# EAGLE board motorshieldv7_jd (EAGLE 5.06)
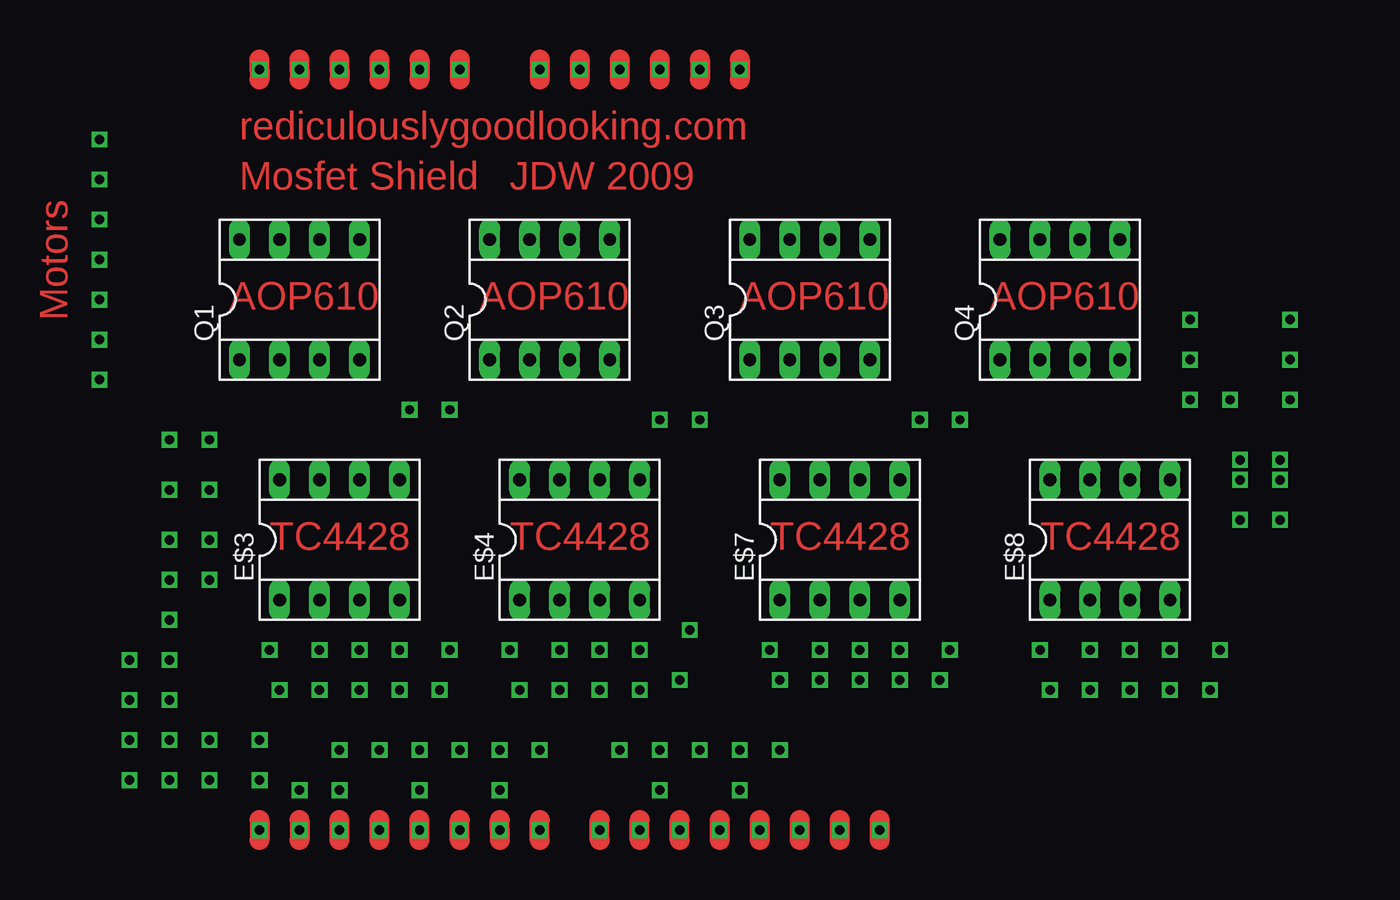
[diagram p0: board, top side]
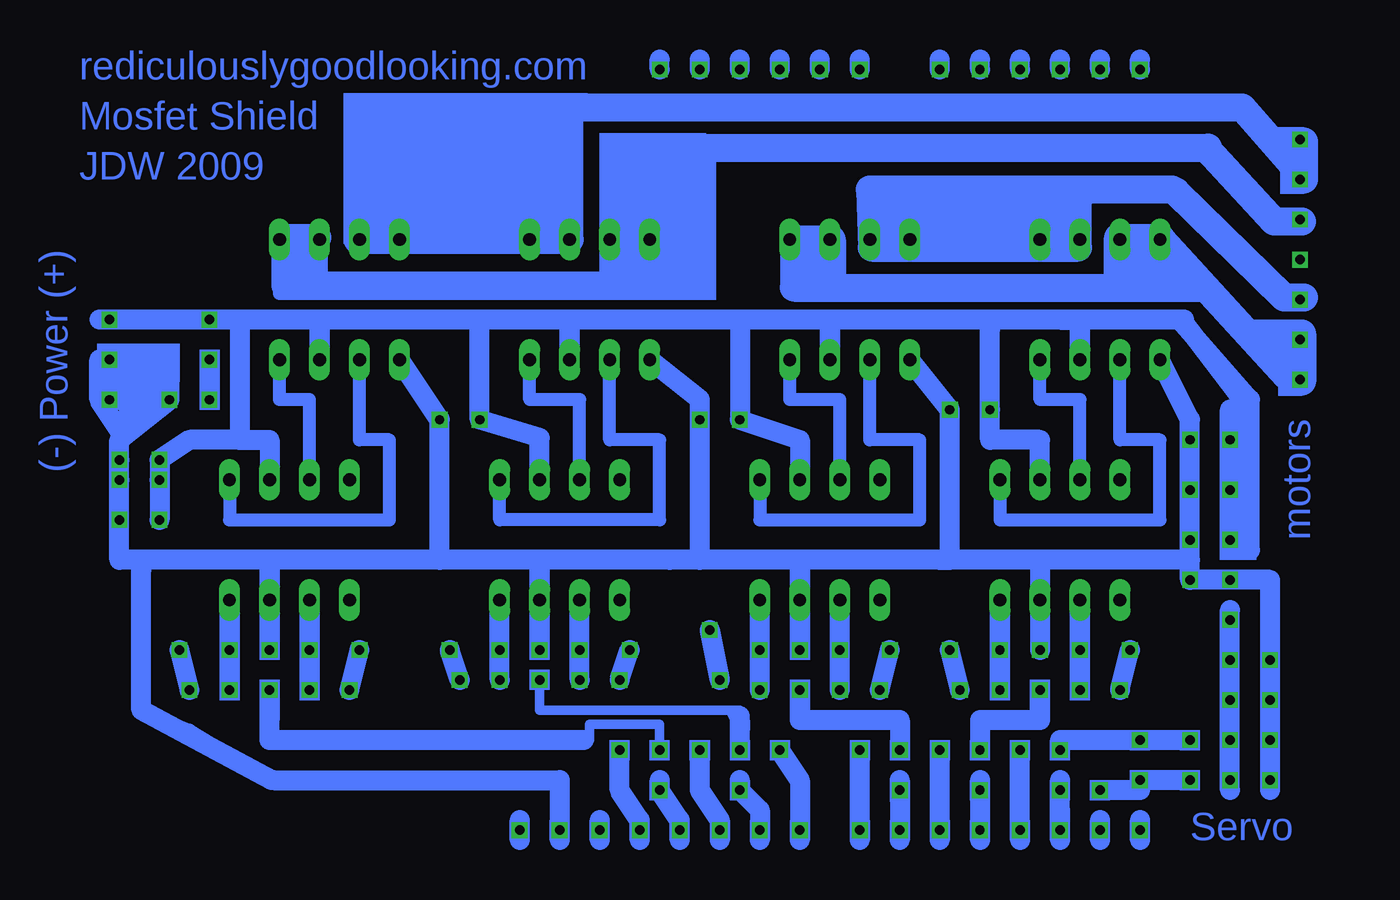
[diagram p1: board, bottom side, seen from below]

No outline drawn. Coordinates in mm, seen from the top.
Copper layers (1*16): Top 0.035mm / dielectric 1.5mm / Bottom 0.035mm
Design rules "default": minimum track width 10mil, minimum drill 24mil, track to track 8mil, track to pad 8mil, pad to pad 8mil, via to via 8mil, smd to smd 8mil, copper to edge 40mil, drill to drill 8mil, minimum pad ring 10mil, minimum via ring 8mil, stop-mask expansion 4mil, vias tented up to drill 0mil, thermal gap 10mil

## Footprints (pad centres in the part's own frame; a part is rotated, then mirrored left to right if it is on the bottom)
SOCKET-08 = drill 0.813 long: 1 -3.81,-3.81; 2 -1.27,-3.81; 3 1.27,-3.81; 4 3.81,-3.81; 5 3.81,3.81; 6 1.27,3.81; 7 -1.27,3.81; 8 -3.81,3.81

## Placement (x,y rotation side)
E$3  TC4427  [SOCKET-08]  15.24,18.41 0 top
E$4  TC4427  [SOCKET-08]  30.48,18.41 0 top
E$7  TC4427  [SOCKET-08]  46.99,18.41 0 top
E$8  TC4427  [SOCKET-08]  64.14,18.41 0 top
Q1  AOP610  [SOCKET-08]  12.7,33.66 0 top
Q2  AOP610  [SOCKET-08]  28.57,33.66 0 top
Q3  AOP610  [SOCKET-08]  45.09,33.66 0 top
Q4  AOP610  [SOCKET-08]  60.96,33.66 0 top

## Library data of the parts
E$3 E$4 E$7 E$8 Q1-Q4 = ic-package

## Nets
GND: E$3.3 E$4.3 E$7.3 E$8.3 Q1.1 Q2.1 Q3.1 Q4.1
S$1: E$3.5 Q1.2
S$3: E$3.7 Q1.4
S$6: E$4.7 Q2.4
S$7: E$4.5 Q2.2
S$11: Q3.7 Q3.8 Q4.5 Q4.6
S$12: Q1.7 Q1.8 Q2.5 Q2.6
S$13: E$3.2
S$15: E$3.4
S$16: Q3.6
S$18: E$7.5 Q3.2
S$19: Q1.3 Q2.3 Q3.3
S$22: E$7.7 Q3.4
S$23: E$8.7 Q4.4
S$28: E$8.5 Q4.2
S$29: E$4.2
S$31: E$4.4
S$32: E$7.2
S$34: E$7.4
S$35: E$8.2
S$39: Q1.6
S$41: E$8.4
S$72: E$7.6
VCC: Q4.3

## Tracks (layer width: path | path; a pad name or v marks a point on that pad's centre or on a via)
GND  (via drill 0.6)
  Bottom 0.406: v65.41,11.43 E$8.3 65.41,17.14 | v48.26,11.43 E$7.3 48.26,17.14 | v31.75,11.43 E$4.3 31.75,16.51 | v22.23,26.67 22.23,27.3 | v16.51,11.43 E$3.3 16.51,17.14
  Bottom 0.813: 46.99,3.17 v46.99,0 | 65.15,3.17 65.28,3.17 70.48,6.35 73.66,7.62 73.66,17.14 65.41,17.14 | 65.41,17.14 v65.41,11.43 | 65.41,17.14 54.61,17.14 48.26,17.14 | 48.26,17.14 v48.26,11.43 | 48.26,17.14 40.01,17.14 38.1,17.14 | 31.75,16.51 31.75,17.14 22.86,17.14
  Bottom 1.27: 46.99,-0.64 46.99,3.17 65.15,3.17 | 73.53,16.51 73.53,7.62 65.28,3.17 | 71.75,29.84 v71.75,27.3 74.93,24.77 v74.93,23.5 v74.93,22.23 74.93,17.14 73.66,17.14 40.01,17.14 22.86,17.14 | Q4.1 54.61,26.04 54.61,17.14 | Q3.1 38.1,27.3 38.1,17.14 | 31.75,16.51 v31.75,11.43 | v22.23,26.67 Q2.1 v22.23,26.67 | v22.23,26.67 22.23,17.14 22.86,17.14 | 16.51,17.14 22.86,17.14 | 16.51,17.14 v16.51,11.43 | Q1.1 6.99,26.04 v6.99,15.88 | 16.51,17.14 6.99,17.14 v6.99,15.88 | v6.99,15.88 1.91,15.88 1.91,2.54
S$1
  Bottom 0.813: E$3.5 19.05,19.68 8.89,19.68 8.89,24.77 11.43,24.77 Q1.2
S$2  (via drill 0.6)
  Bottom 0.406: v31.75,0 31.75,3.17 33.02,4.45 v33.02,5.08
  Bottom 1.27: 31.75,-0.64 31.75,3.17 v33.02,5.08
S$3
  Bottom 0.813: E$3.7 13.97,27.3 16.51,27.3 Q1.4
S$4  (via drill 0.6)
  Bottom 0.406: v34.29,0 34.29,1.27
  Bottom 1.27: 34.29,-0.64 34.29,1.27 v35.56,2.54 35.56,3.17
S$5  (via drill 0.6)
  Bottom 0.406: v36.83,0 36.83,0.64 36.83,1.27 38.1,2.54
  Bottom 1.27: 36.83,-0.64 36.83,0.64 38.1,2.54 v38.1,5.08
S$6
  Bottom 0.813: Q2.4 32.38,27.3 29.21,27.3 E$4.7
S$7
  Bottom 0.813: E$4.5 34.29,19.68 24.13,19.68 24.13,24.77 27.3,24.77 Q2.2
S$8  (via drill 0.6)
  Bottom 0.406: v40.64,2.54 39.37,1.27 39.37,0.64
  Bottom 1.27: 39.37,-0.64 v39.37,0 39.37,0.64 v40.64,2.54 40.64,3.17
S$9  (via drill 0.6)
  Bottom 0.406: v41.91,0 41.91,0.64 41.91,1.27 43.18,2.54
  Bottom 1.27: 41.91,-0.64 41.91,0.64 43.18,2.54 v43.18,5.08
S$10  (via drill 0.6)
  other vias: 44.45,0
S$11  (via drill 0.6)
  Bottom 0.406: Q4.5 Q4.6 | 38.1,37.47 Q3.8
  Bottom 0.813: Q4.5 Q4.6 | Q4.5 62.1,37.47 | Q4.5 64.77,34.04 43.81,34.04 Q3.7 | Q3.7 43.81,34.92 | Q3.7 38.1,37.47 38.1,43.69 6.86,43.69 1.91,38.73 v0,38.73
S$12
  Bottom 0.406: Q2.6 32.13,37.47 Q2.5 | Q1.8 Q1.7
  Bottom 0.813: 0.25,30.86 0.51,28.83 0.51,28.96 8.89,37.72 11.56,37.72 11.56,37.59 11.56,34.67 32.38,34.67 32.38,37.59 29.59,37.59 | Q1.8 Q1.7
  Bottom 1.778: 29.72,37.47 32.13,37.47 32.13,34.42 11.56,34.42 11.56,37.59 9.02,37.59 Q1.8 8.76,37.47 0.89,28.83
S$13  (via drill 0.6)
  Bottom 0.406: E$3.2 v13.97,11.43 v13.97,8.89
  Bottom 0.813: v13.97,8.89 E$3.2
S$14  (via drill 0.6)
  Bottom 1.27: v16.51,8.89 16.51,6.99 20.32,6.99 v20.32,5.08
S$15  (via drill 0.6)
  Bottom 0.406: E$3.4 v19.05,11.43 v19.05,8.89
  Bottom 1.27: v19.05,8.89 19.05,15.24
S$16
  Bottom 0.406: 46.35,38.1 46.35,38.73
  Bottom 0.813: Q3.6 46.35,38.1
  Bottom 1.778: 59.82,37.47 Q3.6 46.35,45.72
S$17  (via drill 0.6)
  Bottom 0.406: v4.45,18.41 v4.45,21.59
  Bottom 0.813: v4.45,18.41 v4.45,21.59
S$18
  Bottom 0.813: E$7.5 50.8,19.68 40.64,19.68 40.64,24.77 43.81,24.77 Q3.2
S$19  (via drill 0.6)
  Bottom 0.813: 46.35,32.38 52.07,32.38 | 46.35,32.38 Q3.3 | 46.35,32.38 35.56,32.38 29.84,32.38 Q2.3 | 15.24,32.38 19.05,32.38 19.68,32.38 | 13.97,32.38 Q1.3
  Bottom 1.27: 31.75,21.59 31.75,24.77 v35.56,26.04 35.56,32.38 | v72.39,19.68 v72.39,22.23 v72.39,23.5 70.48,24.77 67.31,24.77 | 65.41,21.59 65.41,24.77 67.31,24.77 | 19.05,32.38 35.56,32.38 | 35.56,32.38 67.31,32.38 | 67.31,32.38 76.2,32.38 | 67.31,32.38 67.31,24.77 | 15.24,32.38 35.56,32.38 | 15.24,32.38 13.97,32.38 13.97,29.21 | 15.24,32.38 7.62,32.38 3.17,27.3 3.17,17.78 4.45,17.78 4.45,26.67
S$20  (via drill 0.6)
  Bottom 0.406: v6.99,5.71 v10.16,5.71 15.24,5.71
  Bottom 1.27: v6.99,5.71 15.24,5.71 v15.24,5.08
S$21  (via drill 0.6)
  other vias: 0,36.2
S$22
  Bottom 0.406: Q3.4 48.9,27.94
  Bottom 0.813: E$7.7 45.72,27.3 48.9,27.3 Q3.4
S$23
  Bottom 0.406: Q4.4 64.77,27.94
  Bottom 0.813: E$8.7 62.87,27.3 64.77,27.3 Q4.4
S$24  (via drill 0.6)
  Bottom 0.813: 1.27,33.66 v0,33.66
S$25  (via drill 0.6)
  other vias: 4.45,8.26
S$26  (via drill 0.6)
  Bottom 1.27: v40.64,48.26 40.64,48.9
S$27  (via drill 0.6)
  Bottom 1.27: v35.56,48.26 35.56,48.9
S$28
  Bottom 0.813: E$8.5 67.94,19.68 57.78,19.68 57.78,24.77 59.69,24.77 Q4.2
S$29  (via drill 0.6)
  Bottom 0.406: E$4.2 v29.21,11.43 v29.21,8.89
  Bottom 1.27: v29.21,8.89 29.21,15.24
S$30  (via drill 0.6)
  Bottom 1.27: v25.4,5.08 25.4,6.99 31.75,6.99 v31.75,8.89
S$31  (via drill 0.6)
  Bottom 0.406: E$4.4 v34.29,11.43 v34.29,8.89
  Bottom 1.27: v34.29,8.89 34.29,15.24
S$32  (via drill 0.6)
  Bottom 0.406: v45.72,11.43 E$7.2 | v45.72,11.43 v45.72,9.53 v45.72,11.43
  Bottom 0.813: v45.72,11.43 E$7.2
  Bottom 1.27: v45.72,9.53 45.72,15.24
S$33  (via drill 0.6)
  Bottom 0.61: 36.2,7.62 35.56,7.62 35.56,7.24 35.56,6.99 | 36.2,7.62 48.26,7.62 v48.26,9.53 | 35.56,6.35 36.2,7.62
  Bottom 1.27: 35.56,6.99 35.56,6.35 v35.56,5.08 35.56,7.24
S$34  (via drill 0.6)
  Bottom 0.406: E$7.4 v50.8,11.43 v50.8,9.53
  Bottom 0.813: v50.8,9.53 E$7.4
  Bottom 1.27: v50.8,9.53 50.8,15.24
S$35  (via drill 0.6)
  Bottom 0.406: E$8.2 v62.87,11.43 v62.87,8.89
  Bottom 0.813: v62.87,8.89 E$8.2
S$36  (via drill 0.6)
  Bottom 0.61: v40.64,5.08 40.64,6.73 45.09,6.73 45.09,5.71 45.47,5.71
  Bottom 1.27: v65.41,8.89 65.41,5.71 49.53,5.71 45.47,5.71
S$37  (via drill 0.6)
  Bottom 0.406: v69.22,27.3 v69.22,29.84
  Bottom 0.813: v69.22,27.3 v69.22,29.84
S$38  (via drill 0.6)
  other vias: 69.22,32.38
S$39
  Bottom 0.813: 13.97,40.01 Q1.6 13.97,40.89
S$40
  Bottom 1.778: -0.25,41.27 -0.25,43.69
S$41  (via drill 0.6)
  Bottom 0.406: E$8.4 v67.94,11.43 v67.94,8.89
  Bottom 0.813: v67.94,8.89 E$8.4
S$42  (via drill 0.6)
  other vias: 38.1,26.04
S$43
  Bottom 0.813: 1.27,33.78 8.76,41.02 27.3,41.02 27.3,37.34 13.97,37.34 13.97,37.47
S$44  (via drill 0.6)
  Bottom 1.27: 19.68,31.75 v19.68,26.67 19.68,24.77 16.51,24.77 16.51,21.59
S$45  (via drill 0.6)
  other vias: 54.61,26.04
S$46  (via drill 0.6)
  other vias: 4.45,24.77
S$47  (via drill 0.6)
  Bottom 1.27: v38.1,48.26 38.1,48.9
S$48  (via drill 0.6)
  other vias: 4.45,13.34
S$49  (via drill 0.6)
  Bottom 1.27: v33.02,48.26 33.02,48.9
S$50  (via drill 0.6)
  Top 1.27: 30.48,48.9 v30.48,48.26 30.48,47.62
  Bottom 1.27: v30.48,48.26 30.48,48.9
S$51  (via drill 0.6)
  Bottom 1.27: v27.94,48.26 27.94,48.9
S$52  (via drill 0.6)
  Bottom 1.27: v22.86,48.26 22.86,48.9
S$53  (via drill 0.6)
  Bottom 1.27: v20.32,48.26 20.32,48.9
S$54  (via drill 0.6)
  Top 1.27: 17.78,48.9 v17.78,48.26 17.78,47.62
  Bottom 1.27: v17.78,48.26 17.78,48.9
S$55  (via drill 0.6)
  Top 1.27: 15.24,48.9 v15.24,48.26 15.24,47.62
  Bottom 1.27: v15.24,48.26 15.24,48.9
S$56  (via drill 0.6)
  Top 1.27: 12.7,48.9 v12.7,48.26 12.7,47.62
  Bottom 1.27: v12.7,48.26 12.7,48.9
S$57  (via drill 0.6)
  Top 1.27: 10.16,48.9 v10.16,48.26 10.16,47.62
  Bottom 1.27: v10.16,48.26 10.16,48.9
S$58  (via drill 0.6)
  Bottom 1.27: 27.94,-0.64 v27.94,5.08
S$59  (via drill 0.6)
  Bottom 1.27: 22.86,-0.64 v22.86,5.08
S$60  (via drill 0.6)
  Top 1.27: 25.4,-0.64 v25.4,0 25.4,0.64
  Bottom 0.406: v25.4,0 25.4,1.91
  Bottom 1.27: 25.4,1.91 25.4,-0.64 | 25.4,1.91 v25.4,2.54 | 25.4,1.91 25.4,3.17
S$61  (via drill 0.6)
  Bottom 0.406: v20.32,0 v20.32,2.54
  Bottom 1.27: 20.32,-0.64 v20.32,2.54 20.32,3.17
S$62  (via drill 0.6)
  Bottom 1.27: 17.78,-0.64 v17.78,5.08
S$63  (via drill 0.6)
  Bottom 1.27: v15.24,0 15.24,1.27 | 15.24,1.27 v15.24,2.54 15.24,3.17 | 15.24,1.27 15.24,-0.64
S$64  (via drill 0.6)
  other vias: 12.7,0
S$65  (via drill 0.6)
  other vias: 10.16,0
S$66  (via drill 0.6)
  Bottom 0.406: v0,28.57 v0,31.11
  Bottom 0.813: v0,28.57 v0,31.11
S$67
  Bottom 1.778: -0.13,31.5 -0.13,28.45
S$68
  Bottom 0.254: 0.89,31.37 0.89,31.62 1.02,30.99
S$69  (via drill 0.6)
  other vias: 4.45,10.79
S$70  (via drill 0.6)
  Bottom 0.406: v21.59,8.89 v22.23,11.43
  Bottom 1.27: v21.59,8.89 v22.23,11.43
S$71  (via drill 0.6)
  Bottom 0.813: 0,41.4 v0,41.27 | 0,41.4 v0,43.81 | 0,41.4 4.57,46.1 46.1,45.97
S$72
  Bottom 0.813: E$7.6 48.26,24.77
S$73
  Bottom 0.406: 41.78,37.08 41.66,37.08
S$74  (via drill 0.6)
  other vias: 49.53,0
S$75
  Bottom 1.778: 46.23,45.85 3.94,45.85
S$76
  Bottom 1.778: 5.84,43.31 37.97,43.31 37.97,37.85 43.56,37.85 43.56,34.54 64.39,34.54 64.39,37.59 62.36,37.59
S$77  (via drill 0.6)
  other vias: 1.91,8.26
S$78  (via drill 0.6)
  other vias: 4.45,5.71
S$79
  Bottom 1.778: 3.68,45.85 0.13,41.78
S$80  (via drill 0.6)
  other vias: 1.91,5.71
S$81
  Bottom 1.778: -0.13,38.61 1.65,38.61 5.84,43.18
S$82
  Bottom 1.778: -0.25,33.78 1.02,33.78 7.87,40.51
S$83  (via drill 0.6)
  Bottom 0.406: v6.99,3.17 v10.16,3.17
  Bottom 1.27: v12.7,2.54 10.16,2.54 v10.16,3.17 v6.99,3.17
S$84
  Bottom 1.778: 8.13,40.64 27.3,40.64 27.18,36.96 14.1,36.96 14.1,39.88
S$85  (via drill 0.6)
  Bottom 0.406: v11.43,8.89 v10.79,11.43
  Bottom 1.27: v11.43,8.89 v10.79,11.43
S$86  (via drill 0.6)
  Bottom 0.406: v26.67,8.89 v26.04,11.43
  Bottom 1.27: v26.67,8.89 v26.04,11.43
S$87  (via drill 0.6)
  Bottom 1.27: 48.26,21.59 48.26,24.89 v52.07,26.04 52.07,32.26
S$88  (via drill 0.6)
  Bottom 0.406: v36.83,9.53 v37.47,12.7
  Bottom 1.27: v36.83,9.53 v37.47,12.7
S$89  (via drill 0.6)
  other vias: 4.45,3.17
S$90  (via drill 0.6)
  other vias: 6.99,24.77
S$91  (via drill 0.6)
  Bottom 0.406: v42.55,11.43 v43.18,9.53
  Bottom 1.27: v43.18,9.53 v42.55,11.43
S$92  (via drill 0.6)
  other vias: 6.99,21.59
S$93  (via drill 0.6)
  Bottom 0.406: v53.34,9.53 v53.98,11.43
  Bottom 1.27: v53.34,9.53 v53.98,11.43
S$94
  Bottom 1.27: 4.45,2.54 4.45,13.97
S$95  (via drill 0.6)
  Bottom 0.406: v60.33,8.89 v59.69,11.43
  Bottom 1.27: v60.33,8.89 v59.69,11.43
S$96  (via drill 0.6)
  other vias: 6.99,18.41
S$97  (via drill 0.6)
  Bottom 0.406: v70.48,8.89 v71.12,11.43
  Bottom 1.27: v70.48,8.89 v71.12,11.43
S$98  (via drill 0.6)
  other vias: 1.91,10.79
S$99
  Bottom 1.27: 10.16,0.64 10.16,-0.64
S$100
  Bottom 1.27: 12.7,0.64 12.7,-0.64
S$101  (via drill 0.6)
  other vias: 22.86,0
S$102
  Bottom 1.27: 44.45,-0.64 44.45,0.64
S$103
  Bottom 1.27: 49.53,-0.64 49.53,0.64
S$104  (via drill 0.6)
  other vias: 4.45,15.88
S$105  (via drill 0.6)
  other vias: 1.91,3.17
S$106
  Bottom 1.27: 7.37,32.38 7.49,32.38 3.43,27.05
S$107  (via drill 0.6)
  other vias: 75.56,32.38
S$108  (via drill 0.6)
  other vias: 74.93,19.68
S$109  (via drill 0.6)
  other vias: 17.78,0
S$110  (via drill 0.6)
  other vias: 27.94,0
S$111
  Top 1.27: 20.32,48.9 20.32,47.62
S$112
  Bottom 1.27: 74.3,27.3 76.2,27.3 | 74.3,29.84 76.2,29.84 76.2,27.3 | 74.93,25.4 76.2,27.3
S$113  (via drill 0.6)
  Bottom 0.406: v75.56,27.3 v75.56,29.84
  Bottom 0.813: v75.56,27.3 v75.56,29.84
  Bottom 1.27: 73.66,27.94 74.3,26.67 74.3,25.4 72.39,27.94 73.66,28.57 v75.56,27.3
S$114
  Top 1.27: 22.86,48.9 22.86,47.62
S$115
  Top 1.27: 27.94,48.9 27.94,47.62
S$116
  Top 1.27: 33.02,48.9 33.02,47.62
S$117
  Top 1.27: 35.56,48.9 35.56,47.62
S$118
  Top 1.27: 38.1,48.9 38.1,47.62
S$119
  Top 1.27: 40.64,48.9 40.64,47.62
S$120
  Top 1.27: 10.16,0.64 10.16,-0.64
S$121
  Top 1.27: 12.7,0.64 12.7,-0.64
S$122
  Top 1.27: 15.24,-0.64 15.24,0.64
S$123
  Top 1.27: 17.78,-0.64 17.78,0.64
S$124
  Top 1.27: 20.32,-0.64 20.32,0.64
S$125
  Top 1.27: 22.86,-0.64 22.86,0.64
S$126
  Top 1.27: 27.94,-0.64 27.94,0.64
S$127
  Top 1.27: 31.75,-0.64 31.75,0.64
S$128
  Top 1.27: 34.29,-0.64 34.29,0.64
S$129
  Top 1.27: 36.83,-0.64 36.83,0.64
S$130
  Top 1.27: 39.37,-0.64 39.37,0.64
S$131
  Top 1.27: 41.91,-0.64 41.91,0.64
S$132
  Top 1.27: 44.45,-0.64 44.45,0.64
S$133
  Top 1.27: 46.99,-0.64 46.99,0.64
S$134
  Top 1.27: 49.53,-0.64 49.53,0.64
VCC
  Bottom 0.813: Q4.3 62.23,32.38
(copper drawn outside any net)
  shapes: Bottom area x92

## Text on the board
Top: rediculouslygoodlooking.com | Mosfet Shield | JDW 2009 | Motors | AOP610 | AOP610 | AOP610 | AOP610 | TC4428 | TC4428 | TC4428 | TC4428
Bottom: rediculouslygoodlooking.com | Mosfet Shield | JDW 2009 | (-) Power (+) | motors | Servo